# Altium PCB ESP01_Relay.PcbDoc
Units mm, origin at the board's own origin, x right, y up, seen from the top; angles counter-clockwise.
Board outline 45 x 30 mm, 2 copper layers (Top Layer, Bottom Layer); 21 components, 15 nets, 59 pads, 20 vias.
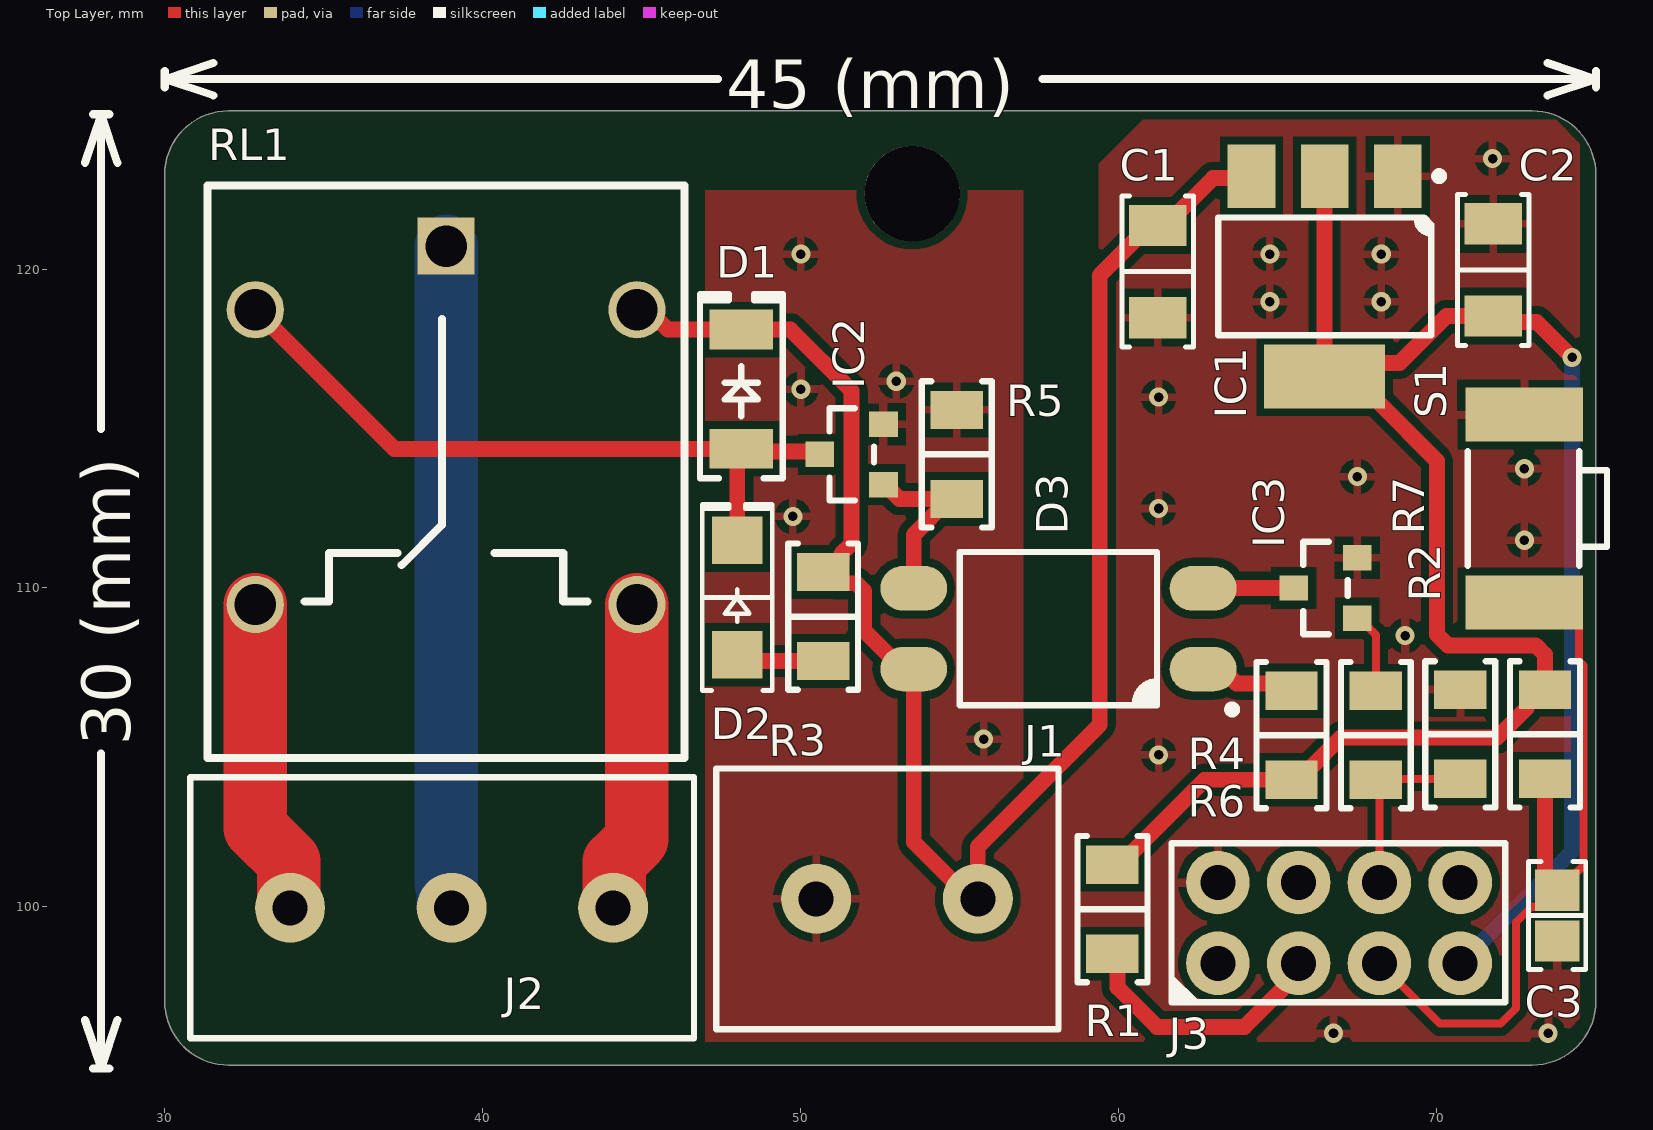
[diagram p0: Top Layer view]
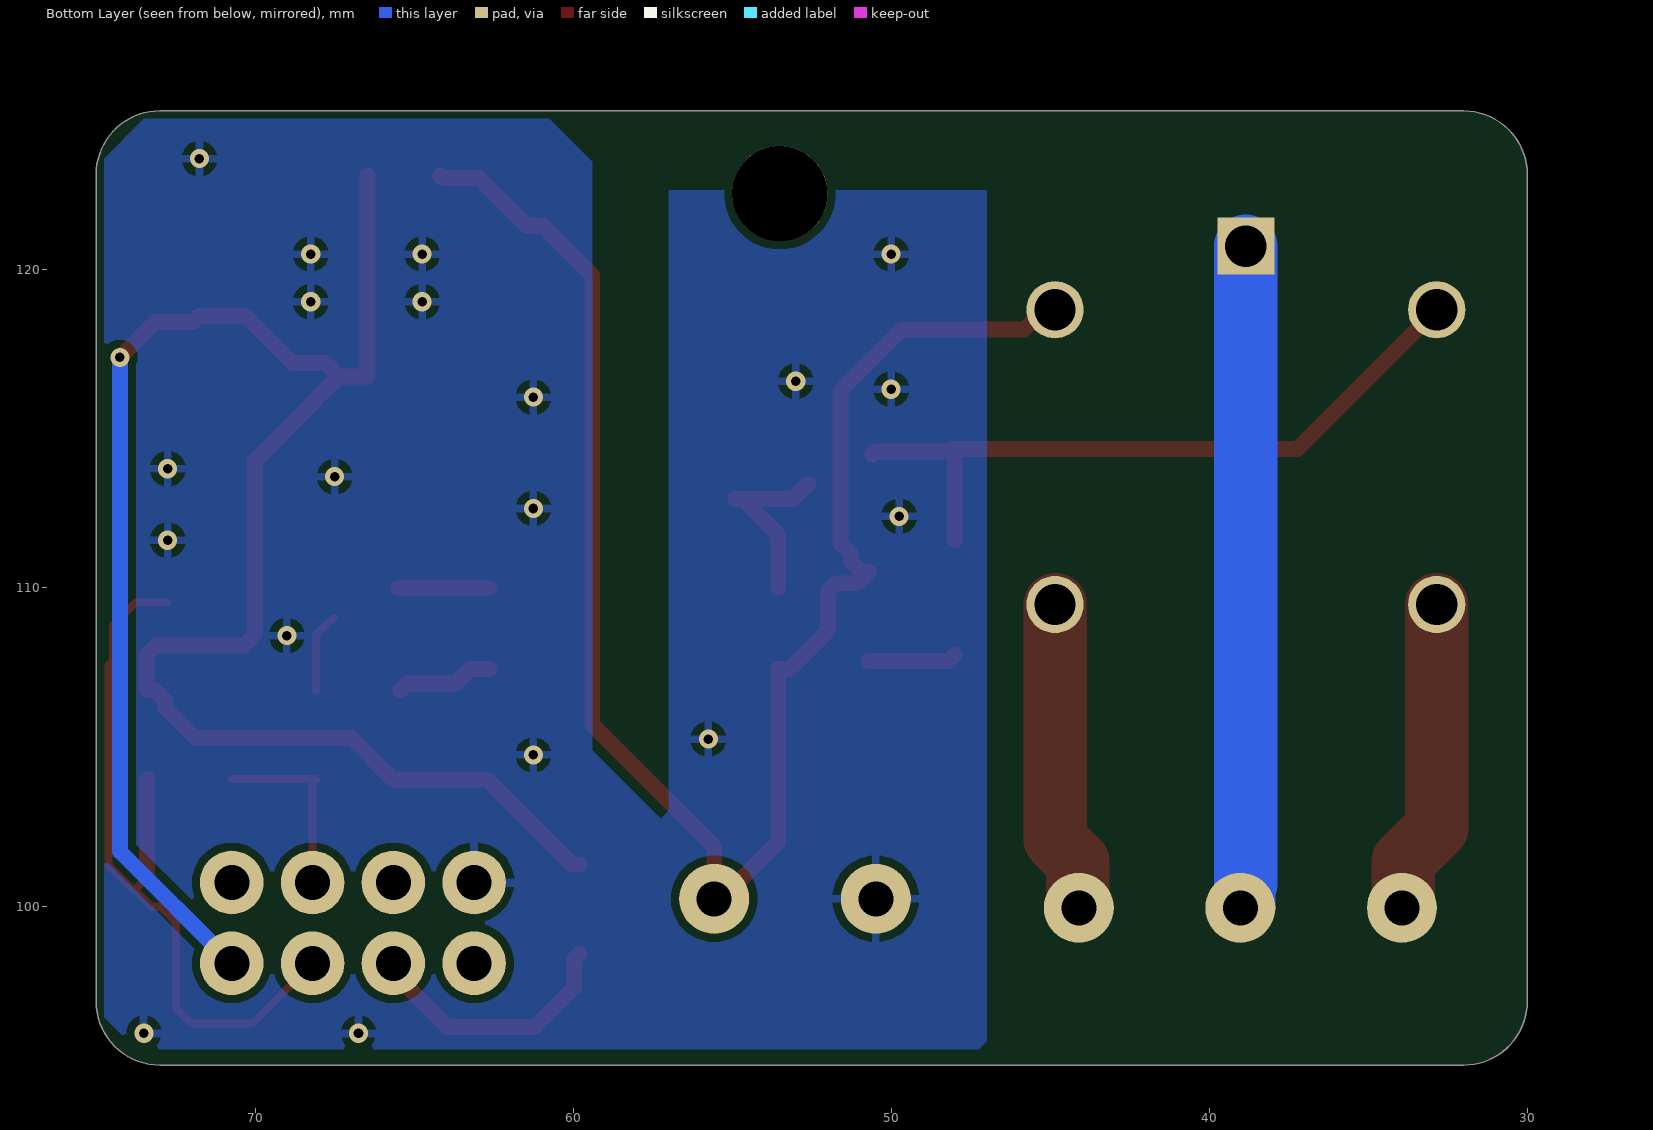
[diagram p1: Bottom Layer view, seen from below]
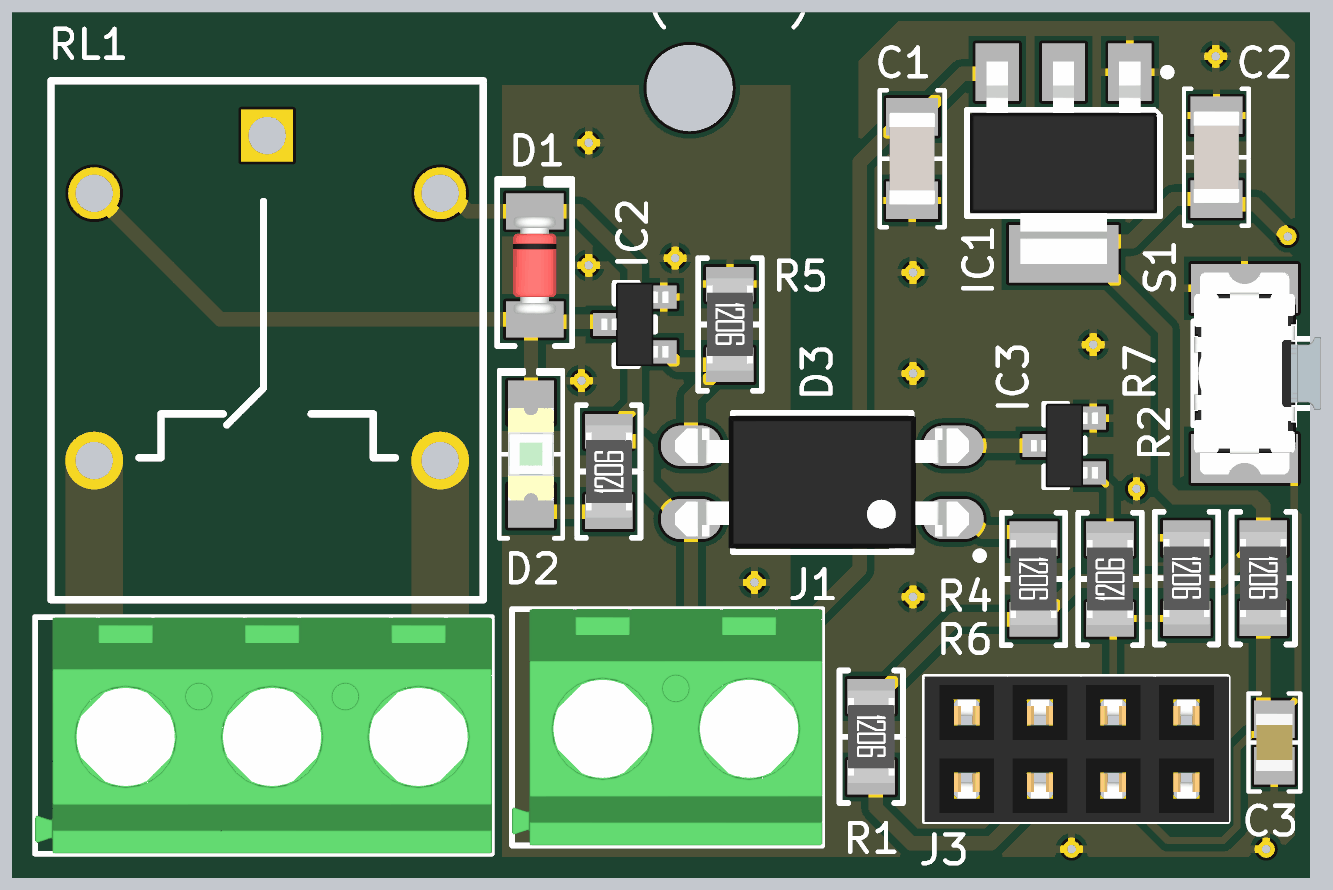
[diagram p2: 3D render of the assembled board from above, using the file's embedded part models]

## Layer stack, top to bottom
Top Solder: solder mask 0.0102, Solder Resist, Dk 3.5
Top Layer: signal copper 0.0356
Dielectric 1: dielectric 0.32, FR-4, Dk 4.8
Bottom Layer: signal copper 0.0356
Bottom Solder: solder mask 0.0102, Solder Resist, Dk 3.5

## Board outline
30,97 30,123 cw(c32,123) 32,125 73,125 cw(c73,123) 75,123 75,97 cw(c73,97) 73,95 32,95 cw(c32,97)

## Design rules (kind name [scope] priority, off if disabled: settings)
Clearance [All] p1: gap=0.254 ignorepadtopadclearanceinfootprint=FALSE except(0: Arc-Hole Track-Hole SMDPad-Hole THPad-Hole Via-Hole Fill-Hole Poly-Hole Region-Hole Text-Hole)
HoleSize [All] p1: absolutevalues=TRUE maxlimit=4 minlimit=0.025 maxpercent=80.000 minpercent=20.000
MinimumSolderMaskSliver [All] p1: minsoldermaskwidth=0.09
PolygonConnect [All] p1: connectstyle=Relief reliefconductorwidth=0.254 reliefentries=4 polygonreliefangle="90 Angle" airgapwidth=0.254
RoutingVias [InNet('No Net')] p1: holewidth=0.6 width=0.6 viastyle="Through Hole" minholewidth=0.2 minwidth=0.2 maxholewidth=0.9 maxwidth=1.27
SilkToSilkClearance [All] p1: silktosilkclearance=0.2
SilkToSolderMaskClearance [IsPad] p1: minsilkscreentomaskgap=0.1 clearancetoexposedcopper=TRUE
SolderMaskExpansion [All] p1: expansion=0.102 istentingtop=FALSE
Width [All] p1: maxlimit=2 minlimit=0.254 preferedwidth=0.5
26 further rules are at their usual default settings.

## Components (designator, comment, footprint, x,y, rotation, side; value= is the part's Value field where it differs from the comment)
C1 "10 µF" "CAP 1206_3216 - 0.8MM" 61.221,119.95 r90 top
C2 "0.1 µF" "CAP 1206_3216 - 0.8MM" 71.775,120 r270 top
C3 "0.1 µF" "CAP 0805_2012" 73.784,99.7 r90 top
D1 "LL4148" "SOD-80 MiniMELF" 48.129,116.25 r90 top
D2 "Green" "LED 1206_3216 GREEN" 48,109.7 r90 top
D3 "LTV-817S-TA1" "LITEON LTV-817" 58.1,108.721 r180 top
IC1 "LD1117AS33TR" "ST SOT-223" 66.471,119.8 r270 top
IC2 "2N7002" "ON SEMI SOT-23-3" 51.6,114.2 r180 top
IC3 "2N7002" "ON SEMI SOT-23-3" 66.5,110 r180 top
J1 "282837-2" "TE 282837-2" 53.024,100.225 r180 top
J2 "282837-3" "TE 282837-3" 39.02,99.944 r180 top
J3 "M20-7830442" "HARWIN M20-7830445" 66.924,99.47 r90 top
R1 "10 kOhms" "RES 1206_3216" 59.8,99.9 r270 top
R2 "10 kOhms" "RES 1206_3216" 73.4,105.4 r270 top
R3 "1 kOhms" "RES 1206_3216" 50.7,109.1 r90 top
R4 "1 kOhms" "RES 1206_3216" 65.429,105.371 r270 top
R5 "10 kOhms" "RES 1206_3216" 54.9,114.2 r270 top
R6 "2 kOhms" "RES 1206_3216" 68.084,105.371 r90 top
R7 "10 kOhms" "RES 1206_3216" 70.738,105.4 r270 top
RL1 "Relay" Relay 38.847,120.75 r270 top
S1 "KSS331GLFS" "C&K KSS" 72.75,112.5 r90 top

## Footprints (in the part's own frame and the unit in brackets; to place one, negate y for a bottom-side part, rotate by r counter-clockwise, add the part's x,y. Pads: shape width x height; smd on the part's side, far side on the other; paste and mask are expansions set on the pad)
"C&K KSS" [mm] "SMT Switch, 2-leads, body 5.5x3.5mm, C&K KSS331GLFS"
  rect 1.7x3.7 smd mask+0.1: 1(-2.95,0) 2(2.95,0)
  silkscreen extent -1.8,-2.6 1.8,1.78, body extent -3.5,-2.65 3.5,1.76, height 2.28
"CAP 0805_2012" [mm] "Chip Capacitor, 2-Leads, Body 2.00x1.20mm, IPC Medium Density"
  rect 1.3x1.4 smd: 1(-0.8,0) 2(0.8,0)
  silkscreen extent -1.7,-0.9 1.7,0.9, body extent -1,-0.64 1,0.64, height 1.26
"CAP 1206_3216 - 0.8MM" [mm] "Chip Capacitor, 2-Leads, Body 3.25x1.60mm, IPC Medium Density"
  rect 1.3x1.8 smd: 1(-1.45,0) 2(1.45,0)
  silkscreen extent -2.37,-1.12 2.37,1.12, body extent -1.6,-0.8 1.6,0.8, height 0.8
"HARWIN M20-7830445" [mm] "2.54mm DIL PC TAIL PIN HEADER ASSEMBLY"
  round 2 hole 1.1: 1(-1.27,3.81) 2(-1.27,1.27) 3(-1.27,-1.27) 4(-1.27,-3.81) 5(1.27,-3.81) 6(1.27,-1.27) 7(1.27,1.27) 8(1.27,3.81)
  silkscreen extent -2.5,-5.23 2.5,5.27, body extent -2.52,-5.28 2.52,5.28, height 8.5
"LED 1206_3216 GREEN" [mm] "Chip Diode, 2-Leads, Body 3.13x1.55mm, IPC Medium Density"
  rect 1.5x1.6 smd: 1(-1.8,0) 2(1.8,0)
  silkscreen extent -2.92,-1.1 2.92,1.1, body extent -1.6,-0.8 1.6,0.8, height 0.9
"LITEON LTV-817" [mm] "SOP, 4-Leads, Body 4.60x6.50mm, Pitch 2.54mm, IPC Medium Density"
  oval 2.1x1.4 smd: 1(-4.55,1.27) 2(-4.55,-1.27) 3(4.55,-1.27) 4(4.55,1.27)
  silkscreen extent -5.59,-2.41 3.1,2.66, body extent -5.1,-2.3 5.1,2.3, height 3.85
"ON SEMI SOT-23-3" [mm] "SOT23, 3-Leads, Body 2.90x2.40mm, Pitch 0.95mm, IPC Medium Density"
  rect 0.9x0.8 smd: 1(-1,0.95) 2(-1,-0.95) 3(1,0)
  silkscreen extent -0.7,-1.45 0.7,1.45, body extent -1.16,-1.45 1.16,1.45, height 1
Relay [mm]
  rect 1.8x1.8 hole 1.3: 0(0,0)
  round 1.8 hole 1.3: 1(2,6) 2(2,-6) 3(11.271,6) 4(11.271,-6)
  silkscreen extent -1.9,-7.5 16.1,7.5
"RES 1206_3216" [mm] "Chip Resistor, 2-Leads, Body 3.13x1.55mm, IPC Medium Density"
  rect 1.2x1.65 smd: 1(-1.4,0) 2(1.4,0)
  silkscreen extent -2.3,-1.1 2.3,1.1, body extent -1.6,-0.8 1.6,0.8, height 0.6
"SOD-80 MiniMELF" [mm] "Molded Diode, 2-Leads, Body 3.40x1.50mm, IPC Medium Density"
  rect 1.25x2 smd: 1(-1.875,0) 2(1.875,0)
  silkscreen extent -2.8,-1.3 2.99,1.3, body extent -1.7,-0.75 1.7,0.75, height 1.5
"ST SOT-223" [mm] "SOT223, 4-Leads, Body 6.50x7.00mm (avg), Pitch 2.30mm, IPC Medium Density"
  rect 2x1.5 smd: 1(-3.15,2.3) 2(-3.15,0) 3(-3.15,-2.3)
  rect 2x3.8 smd: 4(3.15,0)
  silkscreen extent -3.27,-3.35 1.85,3.73, body extent -3.52,-3.25 3.5,3.25, height 1.8
"TE 282837-2" [mm] "Wire to Board Terminal Block Horizontal with Board, 2 Postions, Body 10.76x8.2 mm, Pitch 5.08mm"
  round 2.2 hole 1.1: 1(-2.54,0) 2(2.54,0)
  silkscreen extent -5.08,-4.1 5.68,4.1, body extent -5.08,-4.1 5.68,4.1, height 10.3
"TE 282837-3" [mm] "Wire to Board Terminal Block Horizontal with Board, 3 Postions, Body 15.84x8.2mm, Pitch 5.08mm"
  round 2.2 hole 1.1: 1(-5.08,0) 2(0,0) 3(5.08,0)
  silkscreen extent -7.62,-4.1 8.22,4.1, body extent -7.62,-4.1 8.22,4.1, height 10.3

## Part data
C1: library part 1206B106K160CT, "CAP CER 10UF 16V X7R 1206", Device Package="1206 (3216 Metric)", manufacturer="Walsin Technology Corporation", Operating Temperature="-55°C ~ 125°C", Supplier Part Number 1=1206B106K160CT-ND, Temperature Coefficient=X7R, Tolerance=±10%, Voltage - Rated=16V, Applications="General Purpose", Capacitance="10 µF", componentlink1description=Datasheet, componentlink1url=https://www.passivecomponent.com/wp-content/uploads/datasheet/WTC_MLCC_General_Purpose.pdf, componentlink2description="DigiKey Link", componentlink2url=https://www.digikey.com/en/products/detail/walsin-technology-corporation/1206B106K160CT/6707562, lastupdated="23.10.2023 19:16:40", Lifecycle Status=Active, Minimum Order=2000, Mounting Type="Surface Mount, MLCC", Package / Case="1206 (3216 Metric)", packaging=TapeAndReel, Part Number=1206B106K160CT, Part Status=Active, partid=49918, price=0.20, series=-, Size / Dimension="0.126\" L x 0.063\" W (3.20mm x 1.60mm)", Supplier 1=DigiKey, Thickness (Max)="0.075\" (1.90mm)"
C2: library part 1206B104J500CT, "CAP CER 0.1UF 50V X7R 1206", Device Package="1206 (3216 Metric)", manufacturer="Walsin Technology Corporation", Operating Temperature="-55°C ~ 125°C", Supplier Part Number 1=1292-1602-1-ND, Temperature Coefficient=X7R, Tolerance=±5%, Voltage - Rated=50V, Applications="General Purpose", Capacitance="0.1 µF", componentlink1description=Datasheet, componentlink1url=http://www.passivecomponent.com/wp-content/uploads/2018/10/MLCC.pdf, componentlink2description="DigiKey Link", componentlink2url=https://www.digikey.com/en/products/detail/walsin-technology-corporation/1206B104J500CT/9355099, lastupdated="23.10.2023 19:17:26", Lifecycle Status=Active, Minimum Order=1, Mounting Type="Surface Mount, MLCC", Package / Case="1206 (3216 Metric)", packaging=TapeAndReel, Part Number=1206B104J500CT, Part Status=Active, partid=19711, price=0.02, series=-, Size / Dimension="0.126\" L x 0.063\" W (3.20mm x 1.60mm)", Supplier 1=DigiKey, Thickness (Max)="0.035\" (0.90mm)"
C3: library part CC0805MRX7R9BB104, "CAP CER 0.1UF 50V X7R 0805", Device Package="0805 (2012 Metric)", manufacturer=Yageo, Operating Temperature="-55°C ~ 125°C", Supplier Part Number 1=311-4351-1-ND, Temperature Coefficient=X7R, Tolerance=±20%, Voltage - Rated=50V, Applications="General Purpose", Capacitance="0.1 µF", componentlink1description=Datasheet, componentlink1url=https://www.yageo.com/upload/media/product/productsearch/datasheet/mlcc/UPY-GPHC_X7R_6.3V-to-50V_18.pdf, componentlink2description="DigiKey Link", componentlink2url=https://www.digikey.com/en/products/detail/yageo/CC0805MRX7R9BB104/5884281, lastupdated="24.10.2023 19:16:25", Lifecycle Status=Active, Minimum Order=1, Mounting Type="Surface Mount, MLCC", Package / Case="0805 (2012 Metric)", packaging=TapeAndReel, Part Number=CC0805MRX7R9BB104, Part Status=Active, partid=2475, price=0.01, series=CC, Size / Dimension="0.079\" L x 0.049\" W (2.00mm x 1.25mm)", Supplier 1=DigiKey, Thickness (Max)="0.037\" (0.95mm)"
D1: "DIODE GEN PURP 100V 200MA SOD80", Current - Average Rectified (Io)=200mA, Current - Reverse Leakage @ Vr="25nA @ 20V", manufacturer="ON Semiconductor", Operating Temperature - Junction="-55°C ~ 175°C", Package / Case="DO-213AC, MINI-MELF, SOD-80", Supplier Device Package=SOD-80, Supplier Part Number 1=LL4148FSCT-ND, Voltage - DC Reverse (Vr) (Max)=100V, Voltage - Forward (Vf) (Max) @ If="1V @ 10mA", componentlink1description=Datasheet, componentlink1url=https://www.onsemi.com/pub/Collateral/LL4148-D.pdf, componentlink2description="DigiKey Link", componentlink2url=http://digikey.com/product-detail/en/on-semiconductor/LL4148/LL4148FSCT-ND/1923118, Diode Type=Standard, lastupdated="23.10.2023 20:25:50", Lifecycle Status=Active, Minimum Order=1, Mounting Type="Surface Mount", packaging=TapeAndReel, Part Number=LL4148, Part Status=Active, partid=2621, price=0.02, Reverse Recovery Time (trr)=4ns, series=-, Speed="Small Signal =< 200mA (Io), Any Speed", Supplier 1=DigiKey
D2: library part XZVG55W-A2, "LED GREEN CLEAR 2SMD", Current - Test=20mA, Device Package="1206 (3216 Metric)", Lens Color=Colorless, manufacturer=SunLED, Millicandela Rating=98mcd, Supplier Device Package=2-SMD, Supplier Part Number 1=1497-1403-1-ND, Voltage - Forward (Vf) (Typ)=2.1V, Color=Green, componentlink1description=Datasheet, componentlink1url=https://www.sunledusa.com/products/spec/XZVG55W-A2.pdf, componentlink2description="DigiKey Link", componentlink2url=https://www.digikey.com/en/products/detail/sunled/XZVG55W-A2/4902120, Configuration=Standard, Height (Max)=1.10mm, lastupdated="23.10.2023 20:20:25", Lens Size="1.60mm Dia", Lens Style="Round with Flat Top", Lens Transparency=Clear, Lifecycle Status=Active, Minimum Order=1, Mounting Type="Surface Mount", Package / Case="1206 (3216 Metric)", packaging=TapeAndReel, Part Number=XZVG55W-A2, Part Status=Active, partid=523, price=0.07, series=-, Size / Dimension="3.20mm L x 1.60mm W", Supplier 1=DigiKey, Viewing Angle=70°, Wavelength - Dominant=570nm, Wavelength - Peak=574nm
D3: "OPTOISOLATR 5KV TRANSISTOR 4-SMD", Current - DC Forward (If) (Max)=50mA, Current Transfer Ratio (Max)="600% @ 5mA", Current Transfer Ratio (Min)="50% @ 5mA", Device Package="4-SMD, Gull Wing", manufacturer="Lite-On Inc.", Operating Temperature="-30°C ~ 110°C", Supplier Device Package=4-SMD, Supplier Part Number 1=160-1893-1-ND, Voltage - Forward (Vf) (Typ)=1.2V, Voltage - Output (Max)=35V, Voltage - Isolation=5000Vrms, componentlink1description=Datasheet, componentlink1url=http://optoelectronics.liteon.com/upload/download/DS-70-96-0016/LTV-8X7%20series%20201610%20.pdf, componentlink2description="DigiKey Link", componentlink2url=http://digikey.com/product-detail/en/lite-on-inc/LTV-817S-TA1/160-1893-1-ND/3306757, Current - Output / Channel=50mA, lastupdated="12.01.2020 21:58:48", Lifecycle Status=Active, Minimum Order=1, Mounting Type="Surface Mount", Number of Channels=1, Output Type=Transistor, Package / Case="4-SMD, Gull Wing", packaging=TapeAndReel, Part Number=LTV-817S-TA1, Part Status=Active, price=0.12, Rise / Fall Time (Typ)="4µs, 3µs", series=-, Supplier 1=DigiKey, Vce Saturation (Max)=200mV, Input Type=DC
IC1: "IC REG LINEAR 3.3V 1A SOT223", Current - Output=1A, Current - Quiescent (Iq)="10 mA", manufacturer=STMicroelectronics, Operating Temperature="0°C ~ 125°C", Package / Case="TO-261-4, TO-261AA", Supplier Device Package=SOT-223, Supplier Part Number 1=497-1228-1-ND, Voltage - Output (Min/Fixed)=3.3V, Voltage - Input (Max)=15V, Voltage Dropout (Max)="1.3V @ 1A", componentlink1description=Datasheet, componentlink1url=http://www.st.com/content/ccc/resource/technical/document/datasheet/a5/c3/3f/c9/2b/15/40/49/CD00002116.pdf/files/CD00002116.pdf/jcr:content/translations/en.CD00002116.pdf, componentlink2description="DigiKey Link", componentlink2url=https://www.digikey.com/en/products/detail/stmicroelectronics/LD1117AS33TR/585752, lastupdated="23.10.2023 20:33:15", Lifecycle Status=Active, Minimum Order=1, Mounting Type="Surface Mount", Number of Regulators=1, Output Configuration=Positive, Output Type=Fixed, packaging=TapeAndReel, Part Number=LD1117AS33TR, Part Status=Active, price=0.37, Protection Features="Over Current, Over Temperature", PSRR="75dB (120Hz)", series=-, Supplier 1=DigiKey
IC2 IC3: "MOSFET N-CH 60V 115MA SOT-23", Current - Continuous Drain (Id) @ 25°C="115mA (Ta)", Drain to Source Voltage (Vdss)=60V, Drive Voltage (Max Rds On,  Min Rds On)="5V, 10V", manufacturer="ON Semiconductor", Operating Temperature="-55°C ~ 150°C (TJ)", Package / Case="TO-236-3, SC-59, SOT-23-3", Power Dissipation (Max)="200mW (Ta)", Supplier Device Package="SOT-23 (TO-236AB)", Supplier Part Number 1=2N7002NCT-ND, Input Capacitance (Ciss) (Max) @ Vds="50pF @ 25V", componentlink1description=Datasheet, componentlink1url=https://www.onsemi.com/pub/Collateral/NDS7002A-D.PDF, componentlink2description="DigiKey Link", componentlink2url=http://digikey.com/product-detail/en/on-semiconductor/2N7002/2N7002NCT-ND/244664, FET Type=N-Channel, lastupdated="23.10.2023 20:34:06", Lifecycle Status=Active, Minimum Order=1, Mounting Type="Surface Mount", packaging=TapeAndReel, Part Number=2N7002, Part Status=Active, price=0.06, Rds On (Max) @ Id, Vgs="7.5Ohm @ 500mA, 10V", series=-, Supplier 1=DigiKey, Technology="MOSFET (Metal Oxide)", Vgs (Max)=±20V, Vgs(th) (Max) @ Id="2.5V @ 250µA"
J1: "TERM BLK 2P SIDE ENT 5.08MM PCB", Color=Green, Current="13.5 A", manufacturer="TE Connectivity AMP Connectors", Supplier Part Number 1=A113320-ND, Voltage="300 V", componentlink1description=Datasheet, componentlink1url=https://www.te.com/commerce/DocumentDelivery/DDEController?Action=srchrtrv&DocNm=282837&DocType=Customer+Drawing&DocLang=English, componentlink2description="DigiKey Link", componentlink2url=https://www.digikey.com/en/products/detail/te-connectivity-amp-connectors/282837-2/2187973, Features="Interlocking (Side)", lastupdated="21.06.2022 15:00:23", Lifecycle Status=Active, Mating Orientation="Horizontal with Board", Minimum Order=1, Mounting Type="Through Hole", Number of Levels=1, packaging=Tray, Part Number=282837-2, Part Status=Active, Pitch="0.200\" (5.08mm)", Positions Per Level=2, price=0.31, series=Buchanan, Supplier 1=DigiKey, Wire Gauge="16-28 AWG", Wire Termination="Screw - Rising Cage Clamp"
J2: "TERM BLK 3P SIDE ENT 5.08MM PCB", Color=Green, Current="13.5 A", manufacturer="TE Connectivity AMP Connectors", Supplier Part Number 1=A113321-ND, Voltage="300 V", componentlink1description=Datasheet, componentlink1url=https://www.te.com/commerce/DocumentDelivery/DDEController?Action=srchrtrv&DocNm=282837&DocType=Customer+Drawing&DocLang=English, componentlink2description="DigiKey Link", componentlink2url=https://www.digikey.com/en/products/detail/te-connectivity-amp-connectors/282837-3/2187974, Features="Interlocking (Side)", lastupdated="21.06.2022 15:00:39", Lifecycle Status=Active, Mating Orientation="Horizontal with Board", Minimum Order=1, Mounting Type="Through Hole", Number of Levels=1, packaging=Tray, Part Number=282837-3, Part Status=Active, Pitch="0.200\" (5.08mm)", Positions Per Level=3, price=0.47, series=Buchanan, Supplier 1=DigiKey, Wire Gauge="16-28 AWG", Wire Termination="Screw - Rising Cage Clamp"
J3: "CONN RCPT 8POS 0.1 GOLD PCB", Current Rating (Amps)=3A, manufacturer="Harwin Inc.", Material Flammability Rating="UL94 V-0", Operating Temperature="-40°C ~ 105°C", Supplier Part Number 1=952-1789-ND, Insulation Color=Black, componentlink1description=Datasheet, componentlink1url=https://cdn.harwin.com/pdfs/C001XX_M20_Series_Connectors.pdf, componentlink2description="DigiKey Link", componentlink2url=http://digikey.com/product-detail/en/harwin-inc/M20-7830442/952-1789-ND/3727758, Connector Type=Receptacle, Contact Finish - Mating=Gold, Contact Finish - Post=Tin, Contact Finish Thickness - Mating=Flash, Contact Length - Post="0.118\" (3.00mm)", Contact Type="Female Socket", Fastening Type=Push-Pull, lastupdated="21.09.2022 19:04:26", Lifecycle Status=Active, Mated Stacking Heights="11.04mm, 12.63mm", Minimum Order=1, Mounting Type="Through Hole", Number of Positions=8, Number of Positions Loaded=All, Number of Rows=2, packaging=Tube, Part Number=M20-7830442, Part Status=Active, Pitch - Mating="0.100\" (2.54mm)", price=1.36, Row Spacing - Mating="0.100\" (2.54mm)", series=M20, Style="Board to Board or Cable", Supplier 1=DigiKey, Termination=Solder, Insulation Height="0.335\" (8.51mm)"
R1 R2 R5 R7: library part CRGCQ1206F10K, "RES 10K OHM 1% 1/4W 1206", Device Package="1206 (3216 Metric)", manufacturer="TE Connectivity Passive Product", Operating Temperature="-55°C ~ 155°C", Power (Watts)="0.25W, 1/4W", Ratings=AEC-Q200, Supplier Device Package=1206, Supplier Part Number 1=A129822CT-ND, Temperature Coefficient=±100ppm/°C, Tolerance=±1%, componentlink1description=Datasheet, componentlink1url=https://www.te.com/commerce/DocumentDelivery/DDEController?Action=srchrtrv&DocNm=1773204-3&DocType=DS&DocLang=English, componentlink2description="DigiKey Link", componentlink2url=https://www.digikey.com/en/products/detail/te-connectivity-passive-product/CRGCQ1206F10K/8576424, Composition="Thick Film", Features="Automotive AEC-Q200, Moisture Resistant", Height - Seated (Max)="0.026\" (0.65mm)", lastupdated="23.10.2023 19:45:32", Lifecycle Status=Active, Minimum Order=1, Number of Terminations=2, Package / Case="1206 (3216 Metric)", packaging=TapeAndReel, Part Number=CRGCQ1206F10K, Part Status=Active, partid=27005, price=0.01, Resistance="10 kOhms", series=CRGCQ, Size / Dimension="0.122\" L x 0.061\" W (3.10mm x 1.55mm)", Supplier 1=DigiKey
R3 R4: library part KTR18EZPJ102, "RES SMD 1K OHM 5% 1/4W 1206", Device Package="1206 (3216 Metric)", manufacturer="Rohm Semiconductor", Operating Temperature="-55°C ~ 155°C", Power (Watts)="0.25W, 1/4W", Ratings=AEC-Q200, Supplier Device Package=1206, Supplier Part Number 1=RHM1.0KPCT-ND, Temperature Coefficient=±200ppm/°C, Tolerance=±5%, componentlink1description=Datasheet, componentlink1url=https://www.rohm.com/datasheet/KTR03EZPF/ktr-e, componentlink2description="DigiKey Link", componentlink2url=https://www.digikey.com/en/products/detail/rohm-semiconductor/KTR18EZPJ102/1763425, Composition="Thick Film", Features="Automotive AEC-Q200, High Voltage", Height - Seated (Max)="0.026\" (0.65mm)", lastupdated="23.10.2023 19:45:33", Lifecycle Status=Active, Minimum Order=1, Number of Terminations=2, Package / Case="1206 (3216 Metric)", packaging=TapeAndReel, Part Number=KTR18EZPJ102, Part Status=Active, partid=26955, price=0.02, Resistance="1 kOhms", series=KTR, Size / Dimension="0.126\" L x 0.063\" W (3.20mm x 1.60mm)", Supplier 1=DigiKey
R6: library part AC1206JR-072KL, "RES SMD 2K OHM 5% 1/4W 1206", Device Package="1206 (3216 Metric)", manufacturer=Yageo, Operating Temperature="-55°C ~ 155°C", Power (Watts)="0.25W, 1/4W", Ratings=AEC-Q200, Supplier Device Package=1206, Supplier Part Number 1=YAG3946CT-ND, Temperature Coefficient=±100ppm/°C, Tolerance=±5%, componentlink1description=Datasheet, componentlink1url=https://www.yageo.com/upload/media/product/productsearch/datasheet/rchip/PYu-AC_51_RoHS_L_7.pdf, componentlink2description="DigiKey Link", componentlink2url=https://www.digikey.com/en/products/detail/yageo/AC1206JR-072KL/5897821, Composition="Thick Film", Features="Automotive AEC-Q200, Moisture Resistant", Height - Seated (Max)="0.026\" (0.65mm)", lastupdated="23.10.2023 19:45:31", Lifecycle Status=Active, Minimum Order=1, Number of Terminations=2, Package / Case="1206 (3216 Metric)", packaging=TapeAndReel, Part Number=AC1206JR-072KL, Part Status=Active, partid=27112, price=0.01, Resistance="2 kOhms", series=AC, Size / Dimension="0.122\" L x 0.063\" W (3.10mm x 1.60mm)", Supplier 1=DigiKey
RL1: "Relay 5v 5 pin"
S1: "SWITCH TACTILE SPST-NO 0.05A 50V", Contact Rating @ Voltage="0.05A @ 50VDC", manufacturer=C&K, Operating Force=250gf, Operating Temperature="-40°C ~ 85°C", Supplier Part Number 1=401-1101-1-ND, Actuator Orientation="Side Actuated", Actuator Type="Rectangular Button", Circuit=SPST-NO, componentlink1description=Datasheet, componentlink1url=https://dznh3ojzb2azq.cloudfront.net/products/Tactile/KSS/documents/datasheet.pdf, componentlink2description="DigiKey Link", componentlink2url=http://digikey.com/product-detail/en/c-k/KSS331GLFS/401-1101-1-ND/417673, Features="Tactile Feedback", lastupdated="9.04.2020 09:55:46", Lifecycle Status=Active, Minimum Order=1, Mounting Type="Surface Mount, Right Angle", Outline="7.60mm x 3.70mm", packaging=TapeAndReel, Part Number=KSS331GLFS, Part Status=Active, price=0.35, series=KSS, Supplier 1=DigiKey, Switch Function=Off-Mom, Termination Style="Gull Wing", Illumination=Non-Illuminated, Ingress Protection=IP40

## Free pads (board coordinates)
  round 3 hole 3 unplated: 2(53.5,122.4)

## Via types
v1: diameter 0.6, hole 0.3, Top Layer to Bottom Layer, 20 vias

## Nets (pads, with @x,y where several pads share a name; then routed paths per layer and width w, separated by ;. In a path a pad name is that pad's centre, name@x,y a point inside that pad or via, vN(x,y) a via of type N, cw(c..) or ccw(c..) an arc to the next point about the centre after c; other vN are vias at no path point)
3.3V: C2.2 IC1.2 IC1.4 J3.4 R1.1 R2.1 R4.2 | length 65.7
  Top Layer w0.5: R1.1 60.025,101.3 62.696,103.971 R4.2 65.654,103.971 66.984,105.3 71.9,105.3 72.825,106.225 72.825,106.45 R2.1@73.175,106.8 ; IC1.2 IC1.4 IC1.4@67.371,116.65 ; R2.1 73.4,107.903 73.107,108.196 70.347,108.196 70,108.543 70,114 68.121,115.879 68.121,115.9 IC1.4@67.371,116.65 ; v1(74.25,117.25) 73.132,118.368 71.957,118.368 C2.2 70.3,118.55 68.828,117.078 67.799,117.078 IC1.4@67.371,116.65
  Bottom Layer w0.5: J3.4 74.25,101.716 v1(74.25,117.25)
Ch_Pd: J3.2 R1.2 | length 8.3
  Top Layer w0.5: R1.2 59.957,98.343 59.957,97.443 61.2,96.2 63.95,96.2 65.654,97.904 J3.2
GND: C1.1 C2.1 C3.1 IC1.1 IC2.2 IC3.2 J1.2 J3.8 R5.1 R7.1 S1.2
  other v1: 66.75,96 73.5,96 61.25,104.75 55.75,105.25 69,108.5 72.75,111.5 49.75,112.25 61.25,112.5 67.5,113.5 72.75,113.75 61.25,116 50,116.25 53,116.5 64.75,119 68.25,119 50,120.5 64.75,120.5 68.25,120.5 71.75,123.5
GPIO0: J3.6 R6.1 R7.2 | length 5.9
  Top Layer w0.254: J3.6 68.194,103.86 R6.1 68.113,104 R7.2
NetD1_1: D1.1 D2.2 IC2.3 RL1.2 | length 22.6
  Top Layer w0.5: RL1.2 37.222,114.375 D1.1 ; D2.2 48,114.246 D1.1 ; IC2.3 50.512,114.288 48.216,114.288 D1.1
NetD2_1: D2.1 R3.1 | length 2.8
  Top Layer w0.5: D2.1 48.2,107.7 R3.1
NetD3_1: D3.1 R4.1 | length 3.1
  Top Layer w0.5: D3.1 63.244,107.451 63.694,107 65.2,107 R4.1
NetD3_2: D3.2 IC3.3 | length 2.9
  Top Layer w0.5: D3.2 62.655,109.995 65.495,109.995 IC3.3
NetD3_3: D3.3 IC2.1 R5.2 | length 5.8
  Top Layer w0.5: IC2.1 52.65,113.25 53.1,112.8 R5.2@54.675,112.8 ; D3.3 53.55,111.675 R5.2@54.675,112.8 ; R5.2 R5.2@54.675,112.8
NetJ2_1: J2.1 RL1.3 | length 9.8
  Top Layer w2: J2.1@44.062,99.982 44.084,99.982 44.138,100.036 44.138,101.388 44.847,102.097 RL1.3
NetJ2_2: J2.2 RL1.0 | length 21
  Bottom Layer w1: J2.2@38.42,99.944 38.42,100.268 J2.2@38.847,100.696
  Bottom Layer w2: J2.2@38.847,100.696 RL1.0
NetJ2_3: J2.3 RL1.4 | length 10
  Top Layer w2: RL1.4 32.847,102.453 33.902,101.398 33.902,99.982 J2.3
NetR6_2: IC3.1 R6.2 | length 2.6
  Top Layer w0.254: IC3.1 67.55,109.05 68.084,108.516 R6.2
RST: C3.2 J3.3 R2.2 S1.1 | length 24.1
  Top Layer w0.254: J3.3 70.094,96.3 72,96.3 72.486,96.786 72.486,99.491 72.972,99.977 73.261,99.977 C3.2 ; S1.1 73.75,109.55 74.473,108.827 74.473,107.691 74.606,107.558 74.606,101.272 73.834,100.5 C3.2 ; C3.2@73.4,100.884 C3.2
  Top Layer w0.5: C3.2@73.4,100.884 R2.2
Vcc: C1.2 D1.2 D3.4 IC1.3 J1.1 R3.2 RL1.1 | length 54.6
  Top Layer w0.5: RL1.1 45.199,118.75 45.824,118.125 D1.2 49.675,118.125 51.6,116.2 51.6,111.4 51.275,111.075 51.275,110.85 50.925,110.5 R3.2 51.05,110.15 51.746,110.15 51.996,109.9 51.996,108.655 53.2,107.451 D3.4 53.55,102.014 55.564,100 55.564,101.864 59.4,105.7 59.4,119.829 60.971,121.4 C1.2 61.471,121.4 62.964,122.893 64.114,122.893 IC1.3
pads on no net: J3.1 J3.5 J3.7

## Polygon pours and split planes (outlines as drawn)
GND on Top Layer "GND_L01_P000" (solid, pour order 0): 73.75,124.725 74.5,123.975 74.5,96.475 73.75,95.725 47,95.725 47,122.5 57,122.5 57,103.375 59.363,105.737 59.363,123.338 60.75,124.725
GND on Bottom Layer "GND_L02_P001" (solid, pour order 1): 47,122.5 47,95.75 47.25,95.5 73.75,95.5 74.75,96.5 74.75,123.5 73.5,124.75 60.75,124.75 59.4,123.4 59.4,104.9 57.25,102.75 57,103 57,122.5

## Silkscreen, mask and mechanical layers (free items; w line width, h text height)
Top Overlay:
  lines w0.254: 27.492,96.42 28,94.896 ; 27.492,123.372 28,124.896 ; 27.746,94.896 28.254,94.896 ; 27.746,124.896 28.254,124.896 ; 28,104.792 28,94.896 ; 28,115 28,124.896 ; 28.508,96.42 28,94.896 ; 28.508,123.372 28,124.896 ; 30,125.746 30,126.254 ; 31.524,125.492 30,126 ; 31.524,126.508 30,126 ; 47.396,126 30,126 ; 57.604,126 75,126 ; 73.476,125.492 75,126 ; 73.476,126.508 75,126 ; 75,125.746 75,126.254
  text "45 (mm)" at 47.65,125.086 h1.52
  text "30 (mm)" at 28.914,105.046 h1.52 r90
Mechanical 1:
  the board outline again, w0.254